# EAGLE board xbee_adapter_grupo (EAGLE 5.06)
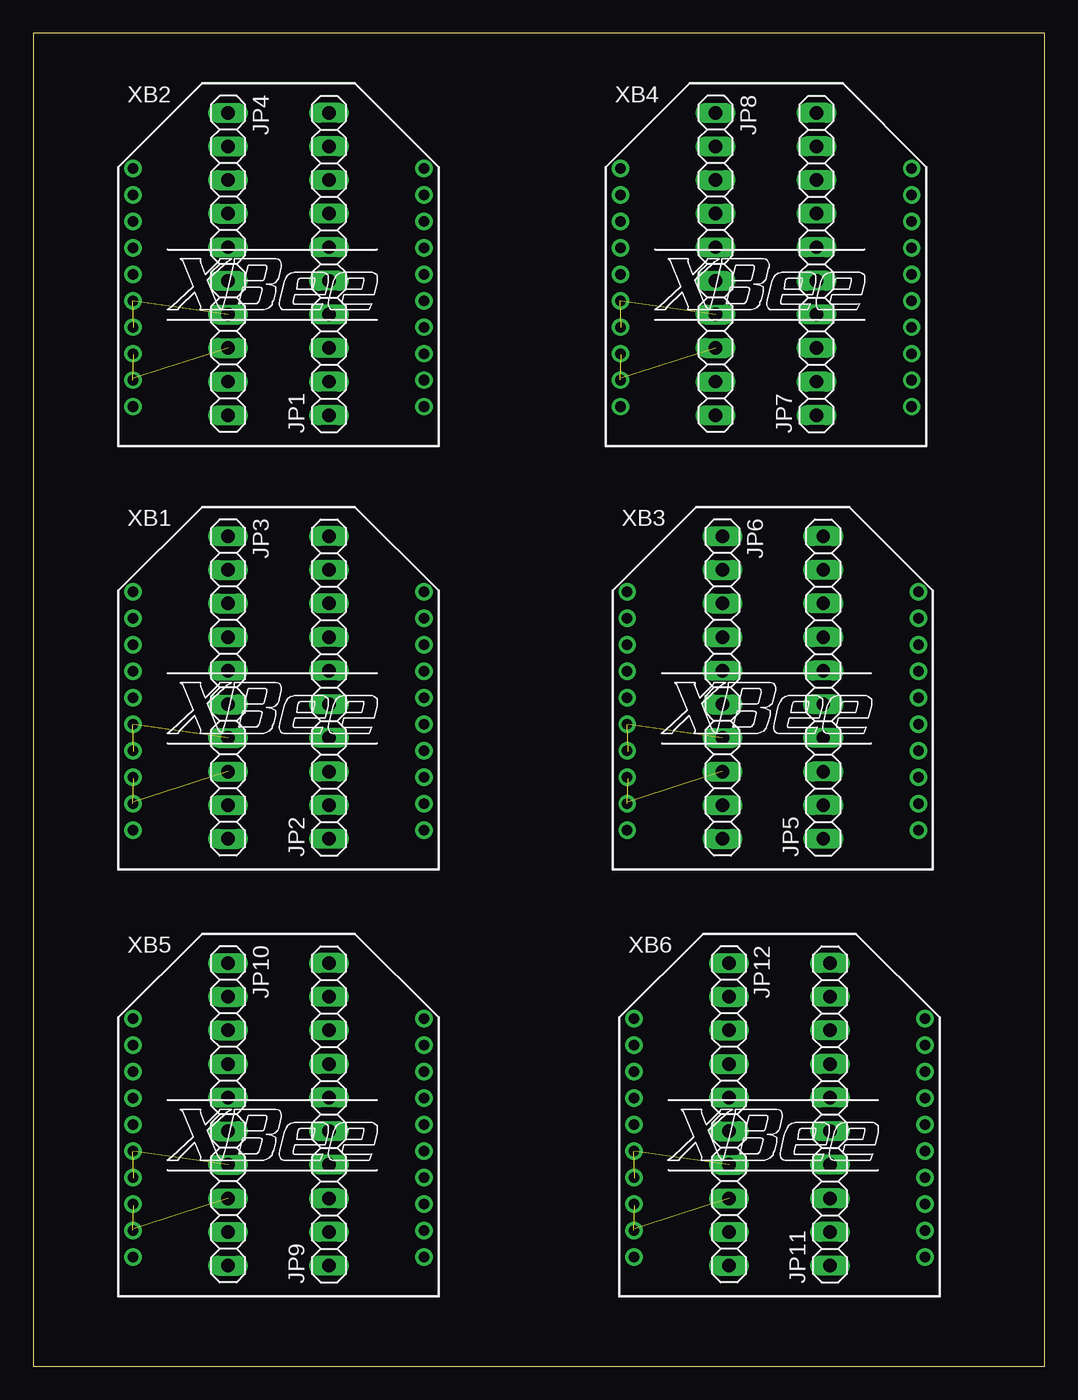
[diagram p0: board, top side]
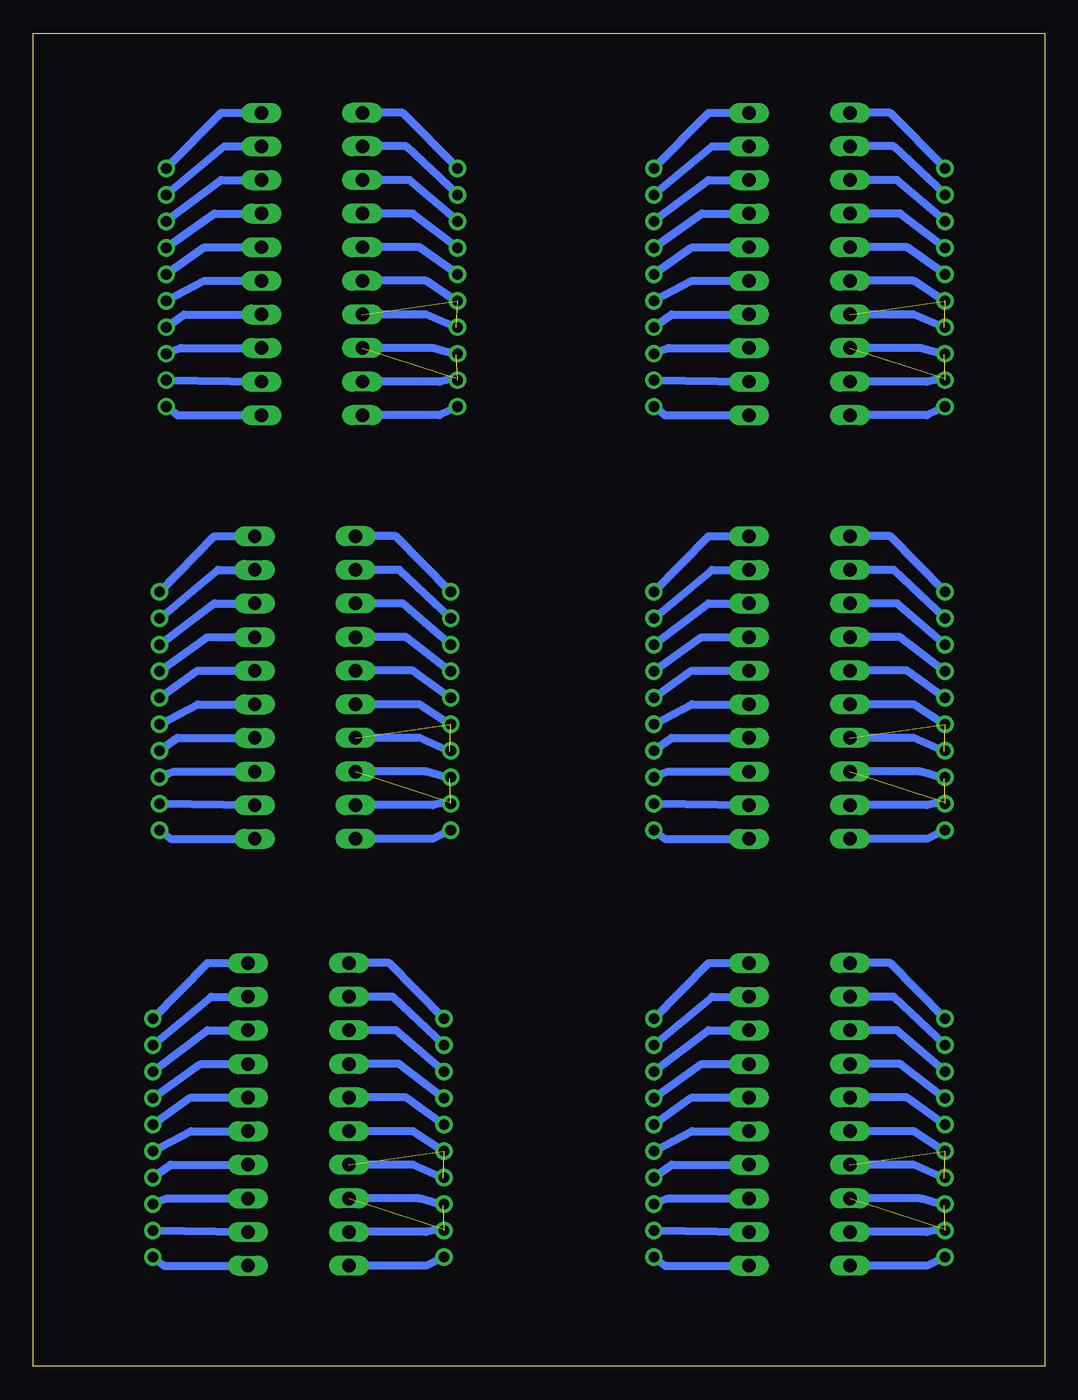
[diagram p1: board, bottom side, seen from below]

Size 76.43 x 100.76 mm. Coordinates in mm from the lower left corner, seen from the top.
Outline: 0,0 76.43,0 76.43,100.76 0,100.76 0,0
Copper layers (1*16): Top 0.035mm / dielectric 1.5mm / Bottom 0.035mm
Design rules "default": minimum track width 10mil, minimum drill 24mil, track to track 8mil, track to pad 8mil, pad to pad 8mil, via to via 8mil, smd to smd 8mil, copper to edge 40mil, drill to drill 8mil, minimum pad ring 10mil, minimum via ring 8mil, stop-mask expansion 4mil, vias tented up to drill 0mil, thermal gap 10mil

## Footprints (pad centres in the part's own frame; a part is rotated, then mirrored left to right if it is on the bottom)
1X10 = drill 1.016 long: 1 -11.43,0; 2 -8.89,0; 3 -6.35,0; 4 -3.81,0; 5 -1.27,0; 6 1.27,0; 7 3.81,0; 8 6.35,0; 9 8.89,0; 10 11.43,0
XBEE = drill 0.8 pad 1.27 round: 1 -11,9; 2 -11,7; 3 -11,5; 4 -11,3; 5 -11,1; 6 -11,-1; 7 -11,-3; 8 -11,-5; 9 -11,-7; 10 -11,-9; 11 11,-9; 12 11,-7; 13 11,-5; 14 11,-3; 15 11,-1; 16 11,1; 17 11,3; 18 11,5; 19 11,7; 20 11,9

## Placement (x,y rotation side)
JP1  [1X10]  22.35,83.31 90 top
JP2  [1X10]  22.35,51.31 90 top
JP3  [1X10]  14.73,51.31 270 top
JP4  [1X10]  14.73,83.31 270 top
JP5  [1X10]  59.69,51.31 90 top
JP6  [1X10]  52.07,51.31 270 top
JP7  [1X10]  59.18,83.31 90 top
JP8  [1X10]  51.56,83.31 270 top
JP9  [1X10]  22.35,19.05 90 top
JP10  [1X10]  14.73,19.05 270 top
JP11  [1X10]  60.2,19.05 90 top
JP12  [1X10]  52.58,19.05 270 top
XB1  XBEE  [XBEE]  18.54,49.53 0 top
XB2  XBEE  [XBEE]  18.54,81.53 0 top
XB3  XBEE  [XBEE]  55.88,49.53 0 top
XB4  XBEE  [XBEE]  55.37,81.53 0 top
XB5  XBEE  [XBEE]  18.54,17.27 0 top
XB6  XBEE  [XBEE]  56.39,17.27 0 top

## Library data of the parts
JP1-JP12 = pinhead
XB1-XB6 = maxstream

## Nets
PIN_1: JP3.1 XB1.1
PIN_2: JP3.2 XB1.2
PIN_3: JP3.3 XB1.3
PIN_4: JP3.4 XB1.4
PIN_5: JP3.5 XB1.5
PIN_6: JP3.6 XB1.6
PIN_7: JP3.7
PIN_8: JP3.8
PIN_9: JP3.9 XB1.9
PIN_10: JP3.10 XB1.10
PIN_11: JP2.1 XB1.11
PIN_12: JP2.2 XB1.12
PIN_13: JP2.3 XB1.13
PIN_14: JP2.4 XB1.14
PIN_15: JP2.5 XB1.15
PIN_16: JP2.6 XB1.16
PIN_17: JP2.7 XB1.17
PIN_18: JP2.8 XB1.18
PIN_19: JP2.9 XB1.19
PIN_20: JP2.10 XB1.20
PIN_21: JP1.10 XB2.20
PIN_22: JP1.9 XB2.19
PIN_23: JP1.8 XB2.18
PIN_24: JP1.7 XB2.17
PIN_25: JP1.6 XB2.16
PIN_26: JP1.5 XB2.15
PIN_27: JP1.3 XB2.13
PIN_28: JP1.2 XB2.12
PIN_29: JP1.1 XB2.11
PIN_30: JP4.10 XB2.10
PIN_31: JP4.9 XB2.9
PIN_32: JP4.8
PIN_33: JP4.7
PIN_34: JP4.6 XB2.6
PIN_35: JP4.5 XB2.5
PIN_36: JP4.2 XB2.2
PIN_37: JP4.4 XB2.4
PIN_38: JP4.3 XB2.3
PIN_39: JP4.1 XB2.1
PIN_40: JP1.4 XB2.14
PIN_41: JP5.10 XB3.20
PIN_42: JP5.9 XB3.19
PIN_43: JP5.8 XB3.18
PIN_44: JP5.7 XB3.17
PIN_45: JP5.6 XB3.16
PIN_46: JP5.5 XB3.15
PIN_47: JP5.3 XB3.13
PIN_48: JP5.2 XB3.12
PIN_49: JP5.1 XB3.11
PIN_50: JP6.10 XB3.10
PIN_51: JP6.9 XB3.9
PIN_52: JP6.8
PIN_53: JP6.7
PIN_54: JP6.6 XB3.6
PIN_55: JP6.5 XB3.5
PIN_56: JP6.2 XB3.2
PIN_57: JP6.4 XB3.4
PIN_58: JP6.3 XB3.3
PIN_59: JP6.1 XB3.1
PIN_60: JP5.4 XB3.14
PIN_61: JP7.10 XB4.20
PIN_62: JP7.9 XB4.19
PIN_63: JP7.8 XB4.18
PIN_64: JP7.7 XB4.17
PIN_65: JP7.6 XB4.16
PIN_66: JP7.5 XB4.15
PIN_67: JP7.3 XB4.13
PIN_68: JP7.2 XB4.12
PIN_69: JP7.1 XB4.11
PIN_70: JP8.10 XB4.10
PIN_71: JP8.9 XB4.9
PIN_72: JP8.8
PIN_73: JP8.7
PIN_74: JP8.6 XB4.6
PIN_75: JP8.5 XB4.5
PIN_76: JP8.2 XB4.2
PIN_77: JP8.4 XB4.4
PIN_78: JP8.3 XB4.3
PIN_79: JP8.1 XB4.1
PIN_80: JP7.4 XB4.14
PIN_81: JP9.10 XB5.20
PIN_82: JP9.9 XB5.19
PIN_83: JP9.8 XB5.18
PIN_84: JP9.7 XB5.17
PIN_85: JP9.6 XB5.16
PIN_86: JP9.5 XB5.15
PIN_87: JP9.3 XB5.13
PIN_88: JP9.2 XB5.12
PIN_89: JP9.1 XB5.11
PIN_90: JP10.10 XB5.10
PIN_91: JP10.9 XB5.9
PIN_92: JP10.8
PIN_93: JP10.7
PIN_94: JP10.6 XB5.6
PIN_95: JP10.5 XB5.5
PIN_96: JP10.2 XB5.2
PIN_97: JP10.4 XB5.4
PIN_98: JP10.3 XB5.3
PIN_99: JP10.1 XB5.1
PIN_100: JP9.4 XB5.14
PIN_101: JP11.10 XB6.20
PIN_102: JP11.9 XB6.19
PIN_103: JP11.8 XB6.18
PIN_104: JP11.7 XB6.17
PIN_105: JP11.6 XB6.16
PIN_106: JP11.5 XB6.15
PIN_107: JP11.3 XB6.13
PIN_108: JP11.2 XB6.12
PIN_109: JP11.1 XB6.11
PIN_110: JP12.10 XB6.10
PIN_111: JP12.9 XB6.9
PIN_112: JP12.8
PIN_113: JP12.7
PIN_114: JP12.6 XB6.6
PIN_115: JP12.5 XB6.5
PIN_116: JP12.2 XB6.2
PIN_117: JP12.4 XB6.4
PIN_118: JP12.3 XB6.3
PIN_119: JP12.1 XB6.1
PIN_120: JP11.4 XB6.14

## Tracks (layer width: path | path; a pad name or v marks a point on that pad's centre or on a via)
PIN_1
  Bottom 0.61: XB1.1 11.68,62.74 JP3.1
PIN_2
  Bottom 0.61: XB1.2 11.43,60.2 JP3.2
PIN_3
  Bottom 0.61: XB1.3 11.18,57.66 JP3.3
PIN_4
  Bottom 0.61: XB1.4 10.92,55.12 JP3.4
PIN_5
  Bottom 0.61: XB1.5 10.41,52.58 JP3.5
PIN_6  (2 unrouted)
  Bottom 0.61: 7.62,46.48 9.91,47.5 14.73,47.5 | 7.62,48.51 9.91,50.04 JP3.6
PIN_9  (2 unrouted)
  Bottom 0.61: 7.62,44.45 9.4,44.96 14.73,44.96 | 7.62,42.67 8.89,42.42 JP3.9
PIN_10
  Bottom 0.61: XB1.10 8.89,39.88 JP3.10
PIN_11
  Bottom 0.61: XB1.11 28.7,39.88 JP2.1
PIN_12
  Bottom 0.61: XB1.12 JP2.2
PIN_13
  Bottom 0.61: XB1.13 28.45,44.96 JP2.3
PIN_14
  Bottom 0.61: XB1.14 28.19,47.5 JP2.4
PIN_15
  Bottom 0.61: XB1.15 26.67,50.04 JP2.5
PIN_16
  Bottom 0.61: XB1.16 26.67,52.58 JP2.6
PIN_17
  Bottom 0.61: XB1.17 25.91,55.12 JP2.7
PIN_18
  Bottom 0.61: XB1.18 25.4,57.66 JP2.8
PIN_19
  Bottom 0.61: XB1.19 25.15,60.2 JP2.9
PIN_20
  Bottom 0.61: XB1.20 25.4,62.74 JP2.10
PIN_21
  Bottom 0.61: XB2.20 25.4,94.74 JP1.10
PIN_22
  Bottom 0.61: XB2.19 25.15,92.2 JP1.9
PIN_23
  Bottom 0.61: XB2.18 25.4,89.66 JP1.8
PIN_24
  Bottom 0.61: XB2.17 25.91,87.12 JP1.7
PIN_25
  Bottom 0.61: XB2.16 26.67,84.58 JP1.6
PIN_26
  Bottom 0.61: XB2.15 26.67,82.04 JP1.5
PIN_27
  Bottom 0.61: XB2.13 28.45,76.96 JP1.3
PIN_28
  Bottom 0.61: XB2.12 JP1.2
PIN_29
  Bottom 0.61: XB2.11 28.7,71.88 JP1.1
PIN_30
  Bottom 0.61: XB2.10 8.89,71.88 JP4.10
PIN_31  (2 unrouted)
  Bottom 0.61: 7.62,76.45 9.4,76.96 14.73,76.96 | 7.62,74.68 8.89,74.42 JP4.9
PIN_34  (2 unrouted)
  Bottom 0.61: 7.62,78.49 9.91,79.5 14.73,79.5 | 7.62,80.52 9.91,82.04 JP4.6
PIN_35
  Bottom 0.61: XB2.5 10.41,84.58 JP4.5
PIN_36
  Bottom 0.61: XB2.2 11.43,92.2 JP4.2
PIN_37
  Bottom 0.61: XB2.4 10.92,87.12 JP4.4
PIN_38
  Bottom 0.61: XB2.3 11.18,89.66 JP4.3
PIN_39
  Bottom 0.61: XB2.1 11.68,94.74 JP4.1
PIN_40
  Bottom 0.61: XB2.14 28.19,79.5 JP1.4
PIN_41
  Bottom 0.61: XB3.20 62.74,62.74 JP5.10
PIN_42
  Bottom 0.61: XB3.19 62.48,60.2 JP5.9
PIN_43
  Bottom 0.61: XB3.18 62.74,57.66 JP5.8
PIN_44
  Bottom 0.61: XB3.17 63.25,55.12 JP5.7
PIN_45
  Bottom 0.61: XB3.16 64.01,52.58 JP5.6
PIN_46
  Bottom 0.61: XB3.15 64.01,50.04 JP5.5
PIN_47
  Bottom 0.61: XB3.13 65.79,44.96 JP5.3
PIN_48
  Bottom 0.61: XB3.12 JP5.2
PIN_49
  Bottom 0.61: XB3.11 66.04,39.88 JP5.1
PIN_50
  Bottom 0.61: XB3.10 46.23,39.88 JP6.10
PIN_51  (2 unrouted)
  Bottom 0.61: 44.96,44.45 46.74,44.96 52.07,44.96 | 44.96,42.67 46.23,42.42 JP6.9
PIN_54  (2 unrouted)
  Bottom 0.61: 44.96,46.48 47.24,47.5 52.07,47.5 | 44.96,48.51 47.24,50.04 JP6.6
PIN_55
  Bottom 0.61: XB3.5 47.75,52.58 JP6.5
PIN_56
  Bottom 0.61: XB3.2 48.77,60.2 JP6.2
PIN_57
  Bottom 0.61: XB3.4 48.26,55.12 JP6.4
PIN_58
  Bottom 0.61: XB3.3 48.51,57.66 JP6.3
PIN_59
  Bottom 0.61: XB3.1 49.02,62.74 JP6.1
PIN_60
  Bottom 0.61: XB3.14 65.53,47.5 JP5.4
PIN_61
  Bottom 0.61: XB4.20 62.23,94.74 JP7.10
PIN_62
  Bottom 0.61: XB4.19 61.98,92.2 JP7.9
PIN_63
  Bottom 0.61: XB4.18 62.23,89.66 JP7.8
PIN_64
  Bottom 0.61: XB4.17 62.74,87.12 JP7.7
PIN_65
  Bottom 0.61: XB4.16 63.5,84.58 JP7.6
PIN_66
  Bottom 0.61: XB4.15 63.5,82.04 JP7.5
PIN_67
  Bottom 0.61: XB4.13 65.28,76.96 JP7.3
PIN_68
  Bottom 0.61: XB4.12 JP7.2
PIN_69
  Bottom 0.61: XB4.11 65.53,71.88 JP7.1
PIN_70
  Bottom 0.61: XB4.10 45.72,71.88 JP8.10
PIN_71  (2 unrouted)
  Bottom 0.61: 44.45,76.45 46.23,76.96 51.56,76.96 | 44.45,74.68 45.72,74.42 JP8.9
PIN_74  (2 unrouted)
  Bottom 0.61: 44.45,78.49 46.74,79.5 51.56,79.5 | 44.45,80.52 46.74,82.04 JP8.6
PIN_75
  Bottom 0.61: XB4.5 47.24,84.58 JP8.5
PIN_76
  Bottom 0.61: XB4.2 48.26,92.2 JP8.2
PIN_77
  Bottom 0.61: XB4.4 47.75,87.12 JP8.4
PIN_78
  Bottom 0.61: XB4.3 48.01,89.66 JP8.3
PIN_79
  Bottom 0.61: XB4.1 48.51,94.74 JP8.1
PIN_80
  Bottom 0.61: XB4.14 65.02,79.5 JP7.4
PIN_81
  Bottom 0.61: XB5.20 25.4,30.48 JP9.10
PIN_82
  Bottom 0.61: XB5.19 25.15,27.94 JP9.9
PIN_83
  Bottom 0.61: XB5.18 25.4,25.4 JP9.8
PIN_84
  Bottom 0.61: XB5.17 25.91,22.86 JP9.7
PIN_85
  Bottom 0.61: XB5.16 26.67,20.32 JP9.6
PIN_86
  Bottom 0.61: XB5.15 26.67,17.78 JP9.5
PIN_87
  Bottom 0.61: XB5.13 28.45,12.7 JP9.3
PIN_88
  Bottom 0.61: XB5.12 JP9.2
PIN_89
  Bottom 0.61: XB5.11 28.7,7.62 JP9.1
PIN_90
  Bottom 0.61: XB5.10 8.89,7.62 JP10.10
PIN_91  (2 unrouted)
  Bottom 0.61: 7.62,12.19 9.4,12.7 14.73,12.7 | 7.62,10.41 8.89,10.16 JP10.9
PIN_94  (2 unrouted)
  Bottom 0.61: 7.62,14.22 9.91,15.24 14.73,15.24 | 7.62,16.26 9.91,17.78 JP10.6
PIN_95
  Bottom 0.61: XB5.5 10.41,20.32 JP10.5
PIN_96
  Bottom 0.61: XB5.2 11.43,27.94 JP10.2
PIN_97
  Bottom 0.61: XB5.4 10.92,22.86 JP10.4
PIN_98
  Bottom 0.61: XB5.3 11.18,25.4 JP10.3
PIN_99
  Bottom 0.61: XB5.1 11.68,30.48 JP10.1
PIN_100
  Bottom 0.61: XB5.14 28.19,15.24 JP9.4
PIN_101
  Bottom 0.61: XB6.20 63.25,30.48 JP11.10
PIN_102
  Bottom 0.61: XB6.19 62.99,27.94 JP11.9
PIN_103
  Bottom 0.61: XB6.18 63.25,25.4 JP11.8
PIN_104
  Bottom 0.61: XB6.17 63.75,22.86 JP11.7
PIN_105
  Bottom 0.61: XB6.16 64.52,20.32 JP11.6
PIN_106
  Bottom 0.61: XB6.15 64.52,17.78 JP11.5
PIN_107
  Bottom 0.61: XB6.13 66.29,12.7 JP11.3
PIN_108
  Bottom 0.61: XB6.12 JP11.2
PIN_109
  Bottom 0.61: XB6.11 66.55,7.62 JP11.1
PIN_110
  Bottom 0.61: XB6.10 46.74,7.62 JP12.10
PIN_111  (2 unrouted)
  Bottom 0.61: 45.47,12.19 47.24,12.7 52.58,12.7 | 45.47,10.41 46.74,10.16 JP12.9
PIN_114  (2 unrouted)
  Bottom 0.61: 45.47,14.22 47.75,15.24 52.58,15.24 | 45.47,16.26 47.75,17.78 JP12.6
PIN_115
  Bottom 0.61: XB6.5 48.26,20.32 JP12.5
PIN_116
  Bottom 0.61: XB6.2 49.28,27.94 JP12.2
PIN_117
  Bottom 0.61: XB6.4 48.77,22.86 JP12.4
PIN_118
  Bottom 0.61: XB6.3 49.02,25.4 JP12.3
PIN_119
  Bottom 0.61: XB6.1 49.53,30.48 JP12.1
PIN_120
  Bottom 0.61: XB6.14 66.04,15.24 JP11.4